# EAGLE board MKRWiFi1010V2.0 (EAGLE 9.3.0)
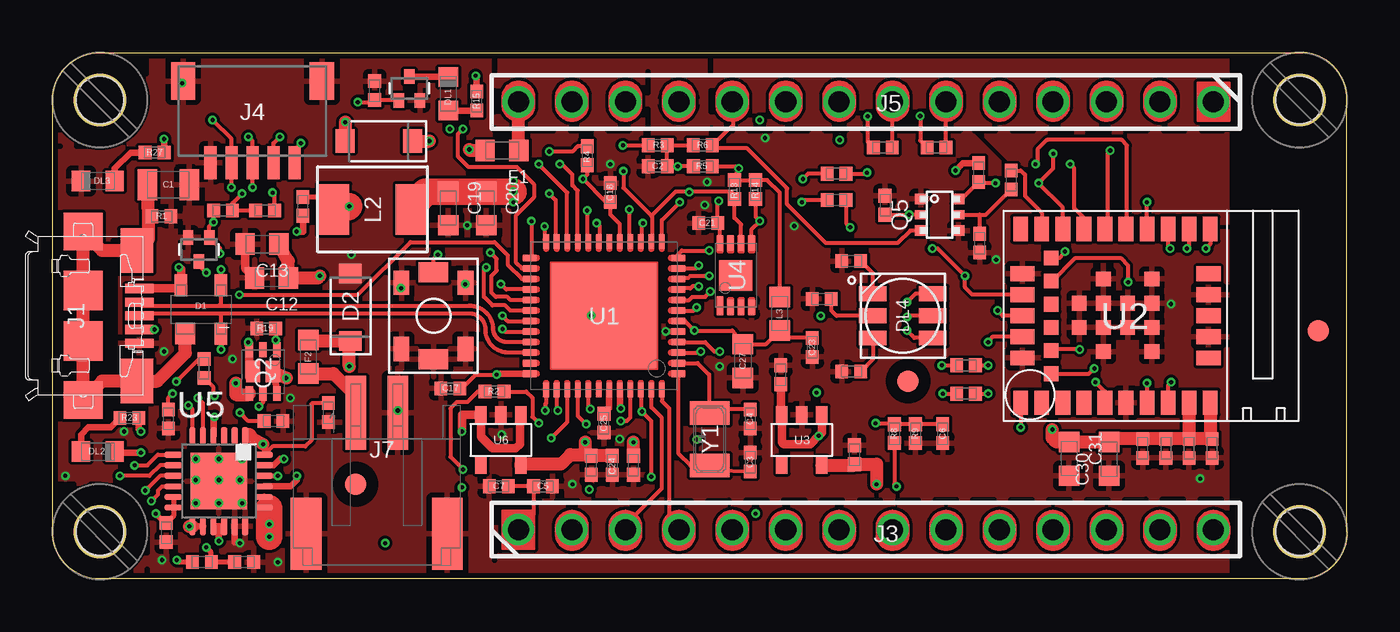
[diagram p0: board, top side]
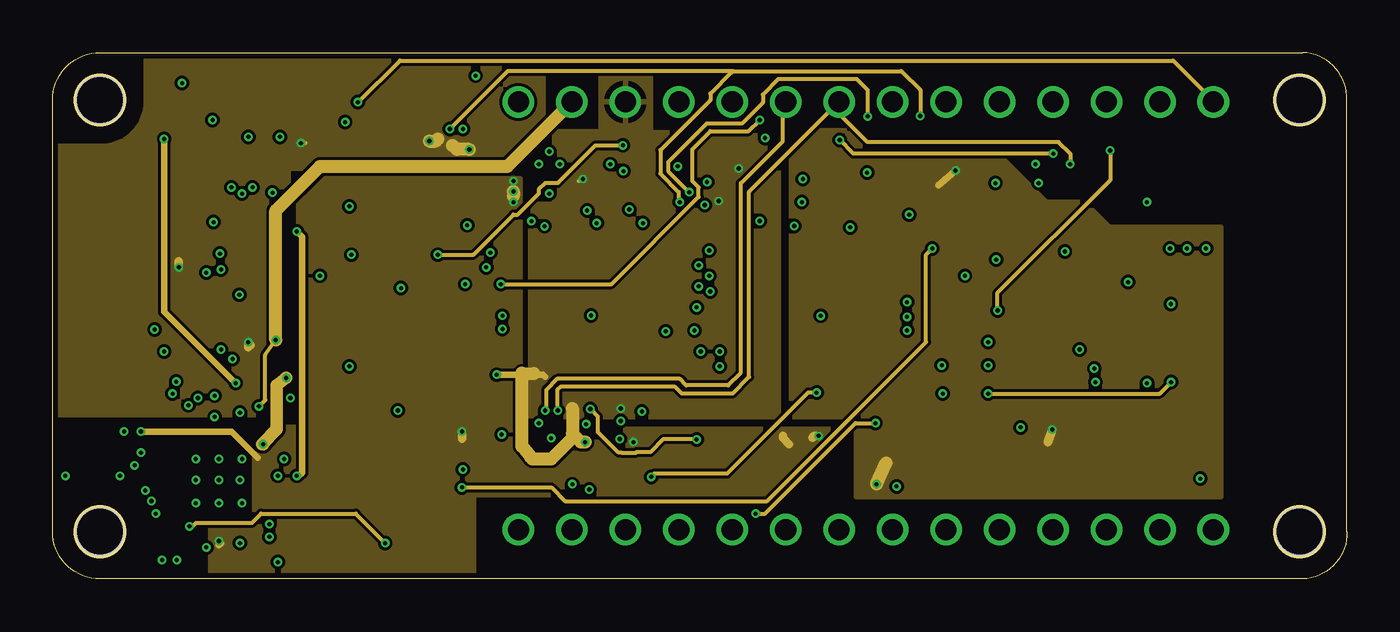
[diagram p1: board, inner layer PWR]
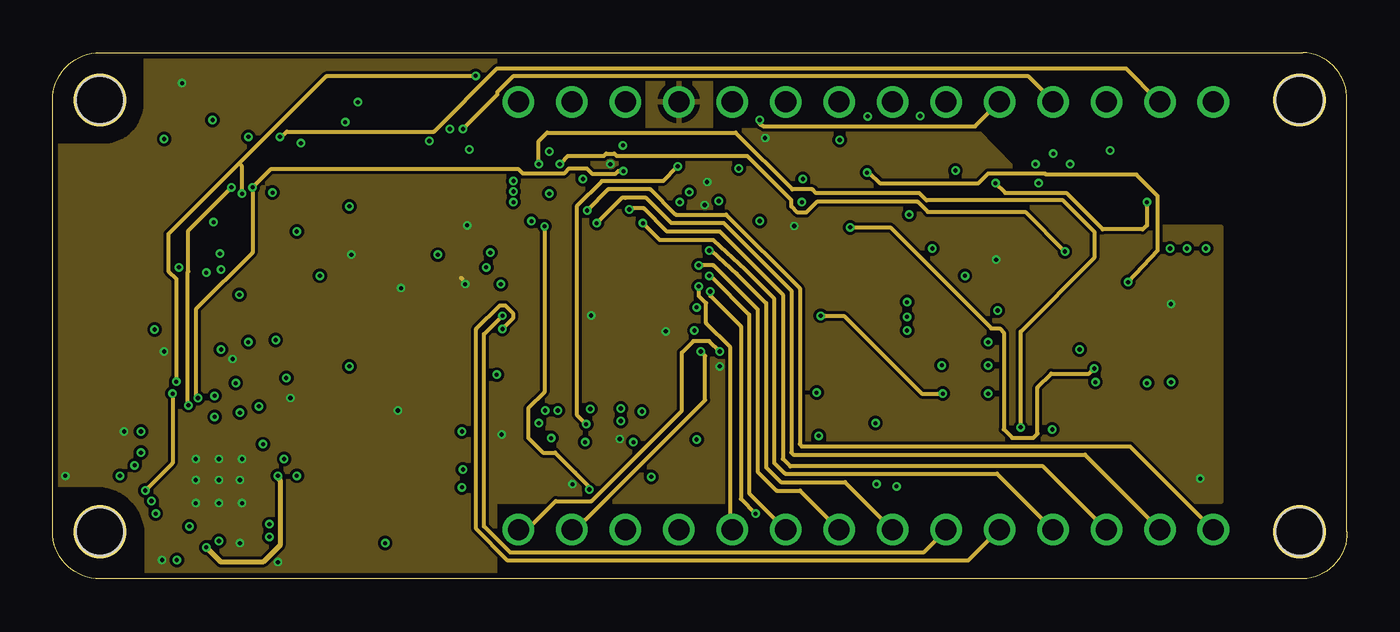
[diagram p2: board, inner layer MID]
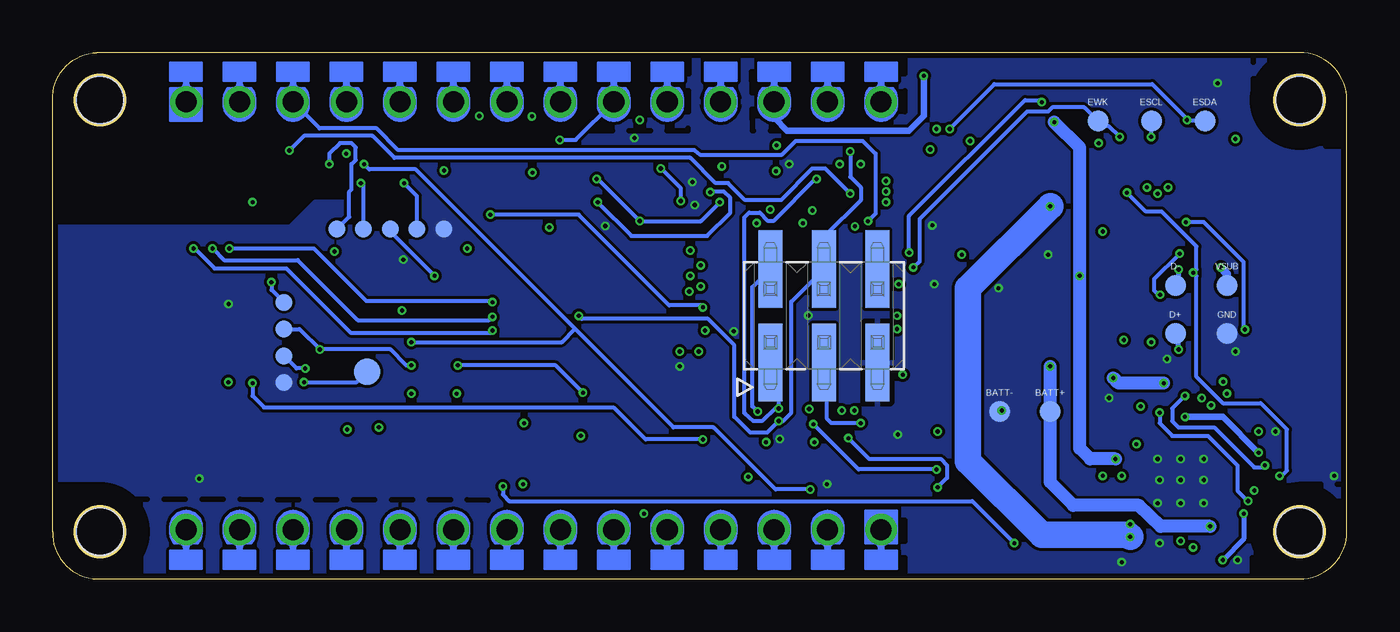
[diagram p3: board, bottom side, seen from below]

Size 61.5 x 25 mm. Coordinates in mm from the lower left corner, seen from the top.
Outline: 0,2.25 0,22.75 arc-90 2.25,25 59.4,25 arc-90 61.5,22.75 61.5,2.25 arc-90 59.4,0 2.25,0 arc-90 0,2.25
Copper layers (1*2*15*16): Top 0.035mm / dielectric 0.2mm / PWR 0.0175mm / dielectric 0.3mm / MID 0.0175mm / dielectric 0.2mm / Bottom 0.035mm
Design rules "B&B_4layers *": minimum track width 6mil, minimum drill 0.195mm, track to track 5.5mil, track to pad 5.5mil, pad to pad 5mil, via to via 5mil, smd to smd 0mil, copper to edge 10mil, drill to drill 8mil, minimum pad ring 6mil, minimum via ring 4mil, stop-mask expansion 4mil, vias tented up to drill 25mil, thermal gap 10mil
Net classes: 0 default: width 0.19 mm, drill 0.19 mm; 1 usb: width 0.19 mm, drill 0.19 mm, clearance 0.127 mm
Holes 2.25 mm at 2.25,2.25 59.25,2.25 59.25,22.75 2.25,22.75
tRestrict: area 0,0 to 4.5,4.5; area 0,20.5 to 4.5,25; area 57,20.5 to 61.5,25; area 57,0 to 61.5,4.5; 119 lines
bRestrict: area 0,0 to 4.5,4.5; area 0,20.5 to 4.5,25; area 57,0 to 61.5,4.5; area 57,20.5 to 61.5,25; 119 lines

## Footprints (pad centres in the part's own frame; a part is rotated, then mirrored left to right if it is on the bottom)
TP-1.00MM = smd 1 x 1 bottom: X 0,0
0805-R2013X50N = smd 0.95 x 1.45: 1 -1,0; 2 1,0
0402-1005X55N = smd 0.62 x 0.62: 1 -0.45,0; 2 0.45,0
0603-1608X90N = smd 0.95 x 1: 1 -0.8,0; 2 0.8,0
SOT190P230X110-4N = smd 1 x 1: 1 -1.15,0.75 | smd 1 x 0.6: 2 -1.15,-0.95; 3 1.15,-0.95; 4 1.15,0.95
SODFL3517X110N = smd 0.91 x 1.07: A 1.605,0; C -1.605,0
LEDC1608X80N-AK = smd 0.9 x 0.95: A 0.8,0; C -0.8,0
RGBLED = smd 1.3 x 0.7: 1 -1.425,1.05; 2 -1.425,0; 3 -1.425,-1.05; 4 1.425,-1.05; 5 1.425,0; 6 1.425,1.05
FD-1-1.5 = smd 1.016 x 1.016: P$1 0,0
TP-0.8MM = smd 0.8 x 0.8 bottom: X 0,0
ZX62-AB-5PA = smd 0.4 x 1.35: 1 -1.3,3.025; 2 -0.65,3.025; 3 0,3.025; 4 0.65,3.025; 5 1.3,3.025 | smd 2.1 x 1.6: 6 3.1,2.9; 11 -3.1,2.9 | smd 1.8 x 1.9: 7 4,0.35; 10 -4,0.35 | smd 1.9 x 1.9: 8 1.2,0.35; 9 -1.2,0.35
2X3_SMT = smd 1.143 x 3.683: 1 -2.54,-2.223; 2 -2.54,2.223; 3 0,-2.223; 4 0,2.223; 5 2.54,-2.223; 6 2.54,2.223
1X14_SMD_TH = drill 1: 1 0,0; 2 2.54,0; 3 5.08,0; 4 7.62,0; 5 10.16,0; 6 12.7,0; 7 15.24,0; 8 17.78,0; 9 20.32,0; 10 22.86,0; 11 25.4,0; 12 27.94,0; 13 30.48,0; 14 33.02,0
SM05B-SRSS-TB = smd 0.6 x 1.55: 1 -2,2.425; 2 -1,2.425; 3 0,2.425; 4 1,2.425; 5 2,2.425 | smd 1.2 x 1.8: SH1 -3.3,-1.45; SH2 3.3,-1.45
JST-S2B-PH-SM4-TB = smd 1 x 3.5: 1 -1,2.95; 2 1,2.95 | smd 1.5 x 3.4: 3 3.35,-2.8; 4 -3.35,-2.8
SRP4020 = smd 1.5 x 2.4: 1 -1.85,0; 2 1.85,0
TP-1.27MM = smd 1.27 x 1.27 bottom: X 0,0
C&K_PTS820_NO_HOLES = smd 1.15 x 0.75: 1 -1.575,1.525; 2 -1.575,-1.525; 3 1.575,1.525; 4 1.575,-1.525 | smd 0.95 x 1.4: 5 -2.075,0; 6 2.075,0
SOTFL50P160X78-3 = smd 0.5 x 0.66: D 0,0.57; G -0.5,-0.57; S 0.5,-0.57
SON65P205X205X75-8N-MWSD = smd 0.67 x 0.37: A 1.04,-0.65; D 1.04,0.65; G -1.04,0; K -1.04,-0.65; NC 1.04,0; S -1.04,0.65 | smd 1 x 0.7: D2 0,0.467; K2 0,-0.467
SOT363 = smd 0.6 x 0.5: 1 -0.9,0.75; 3 -0.9,-0.75; 4 0.9,-0.75; 6 0.9,0.75 | smd 0.6 x 0.4: 2 -0.9,0; 5 0.9,0
QFN50P700X700X90-49XN-EPSQ515 = smd 0.65 x 0.28: 1 -3.525,2.75; 2 -3.525,2.25; 3 -3.525,1.75; 4 -3.525,1.25; 5 -3.525,0.75; 6 -3.525,0.25; 7 -3.525,-0.25; 8 -3.525,-0.75; 9 -3.525,-1.25; 10 -3.525,-1.75; 11 -3.525,-2.25; 12 -3.525,-2.75; 25 3.525,-2.75; 26 3.525,-2.25; 27 3.525,-1.75; 28 3.525,-1.25; 29 3.525,-0.75; 30 3.525,-0.25; 31 3.525,0.25; 32 3.525,0.75; 33 3.525,1.25; 34 3.525,1.75; 35 3.525,2.25; 36 3.525,2.75 | smd 0.28 x 0.65: 13 -2.75,-3.525; 14 -2.25,-3.525; 15 -1.75,-3.525; 16 -1.25,-3.525; 17 -0.75,-3.525; 18 -0.25,-3.525; 19 0.25,-3.525; 20 0.75,-3.525; 21 1.25,-3.525; 22 1.75,-3.525; 23 2.25,-3.525; 24 2.75,-3.525; 37 2.75,3.525; 38 2.25,3.525; 39 1.75,3.525; 40 1.25,3.525; 41 0.75,3.525; 42 0.25,3.525; 43 -0.25,3.525; 44 -0.75,3.525; 45 -1.25,3.525; 46 -1.75,3.525; 47 -2.25,3.525; 48 -2.75,3.525 | smd 5 x 5: 49 0,0
NINA-W1X = smd 0.7 x 1.15: 1 4.95,4.125; 2 3.95,4.125; 3 2.95,4.125; 4 1.95,4.125; 5 0.95,4.125; 6 -0.05,4.125; 7 -1.05,4.125; 8 -2.05,4.125; 9 -3.05,4.125; 10 -4.05,4.125; 16 -4.05,-4.125; 17 -3.05,-4.125; 18 -2.05,-4.125; 19 -1.05,-4.125; 20 -0.05,-4.125; 21 0.95,-4.125; 22 1.95,-4.125; 23 2.95,-4.125; 24 3.95,-4.125; 25 4.95,-4.125 | smd 1.15 x 0.7: 11 -3.975,2; 12 -3.975,1; 13 -3.975,0; 14 -3.975,-1; 15 -3.975,-2; 26 4.875,-2; 27 4.875,-1; 28 4.875,0; 29 4.875,1; 30 4.875,2 | smd 0.7 x 0.7: 31 3.5,2.75; 32 3.5,1.65; 33 3.5,0.55; 34 3.5,-0.55; 35 3.5,-1.65; 36 3.5,-2.75; GND@1 -1.28,1.7; GND@2 -1.28,0.55; GND@3 -1.28,-0.6; GND@4 -1.28,-1.75; GND@5 -0.13,0.55; GND@6 -0.13,-0.6; GND@7 1.02,1.7; GND@8 1.02,0.55; GND@9 1.02,-0.6; GND@10 1.02,-1.75; GND@11 2.17,0.55; GND@12 2.17,-0.6
SOT25 = smd 0.55 x 0.8: 1 0.95,1.2; 2 0,1.2; 3 -0.95,1.2; 4 -0.95,-1.2; 5 0.95,-1.2
SON50P300X200X60-9N-EP160X140 = smd 0.85 x 0.3: 1 -1.45,0.75 | smd 0.7 x 0.3: 2 -1.525,0.25; 3 -1.525,-0.25; 4 -1.525,-0.75; 5 1.525,-0.75; 6 1.525,-0.25; 7 1.525,0.25; 8 1.525,0.75 | smd 1.4 x 1.6: 9 0,0
QFN24 = smd 0.3 x 0.85: 1 1.25,2.155; 2 0.75,2.155; 3 0.25,2.155; 4 -0.25,2.155; 5 -0.75,2.155; 6 -1.25,2.155; 13 -1.25,-2.155; 14 -0.75,-2.155; 15 -0.25,-2.155; 16 0.25,-2.155; 17 0.75,-2.155; 18 1.25,-2.155 | smd 0.85 x 0.3: 7 -2.155,1.25; 8 -2.155,0.75; 9 -2.155,0.25; 10 -2.155,-0.25; 11 -2.155,-0.75; 12 -2.155,-1.25; 19 2.155,-1.25; 20 2.155,-0.75; 21 2.155,-0.25; 22 2.155,0.25; 23 2.155,0.75; 24 2.155,1.25 | smd 2.7 x 2.7: 25 0,0
ABS07 = smd 1.1 x 1.9: 1 -1.25,0; 2 1.25,0

## Placement (x,y rotation side)
BATT+  DNP  [TP-1.00MM]  14.1,7.95 0 top
BATT-  DNP  [TP-1.00MM]  16.5,7.95 0 top
C1  4n7  [0805-R2013X50N]  5.5,18.73 0 top
C2  100n  [0402-1005X55N]  28.75,19.6 180 top
C3  20p  [0402-1005X55N]  33.15,5.55 270 top
C4  20p  [0402-1005X55N]  33.15,7.6 90 top
C5  4u7  [0402-1005X55N]  23.3,4.4 0 top
C6  100n  [0402-1005X55N]  42.3,6.9 270 top
C7  100n  [0402-1005X55N]  21.2,4.4 180 top
C8  100n  [0402-1005X55N]  55.1,6.2 270 top
C9  100n  [0402-1005X55N]  54,6.2 90 top
C12  10u  [0603-1608X90N]  10.4,14.3 180 top
C13  10u  [0603-1608X90N]  9.95,15.9 180 top
C14  1u  [0402-1005X55N]  13.1,7.9 270 top
C15  47n  [0402-1005X55N]  11.9,17.7 90 top
C16  4u7  [0402-1005X55N]  9.1,0.8 0 top
C17  100n  [0402-1005X55N]  18.9,9.05 180 top
C18  100n  [0402-1005X55N]  26.5,18.35 90 top
C19  10u  [0603-1608X90N]  18.8,17.6 270 top
C20  10u  [0603-1608X90N]  20.6,17.6 270 top
C21  100n  [0402-1005X55N]  31.15,16.9 180 top
C22  1u  [0402-1005X55N]  27.6,5.4 270 top
C23  100n  [0402-1005X55N]  36.1,11 270 top
C24  100n  [0402-1005X55N]  26.6,5.4 270 top
C25  1u  [0402-1005X55N]  26.2,7.4 270 top
C26  1u  [0402-1005X55N]  25.6,5.4 270 top
C27  4u7  [0603-1608X90N]  32.8,10.35 270 top
C28  DNP  [0402-1005X55N]  52.9,6.2 90 top
C29  DNP  [0402-1005X55N]  51.8,6.2 270 top
C30  DNP  [0603-1608X90N]  50.2,5.7 90 top
C31  DNP  [0603-1608X90N]  48.3,5.7 270 top
C32  1u  [0402-1005X55N]  34.6,9.7 90 top
C33  1u  [0402-1005X55N]  38.1,5.9 90 top
D1  PRTR5V  [SOT190P230X110-4N]  7.05,12.8 90 top
D2  PMEG6020  [SODFL3517X110N]  14.15,12.9 90 top
D3  PMEG6020  [SODFL3517X110N]  15.5,20.8 180 top
D+  DNP  [TP-1.00MM]  8.15,11.65 0 top
D-  DNP  [TP-1.00MM]  8.15,13.95 0 top
DL1  YELLOW  [LEDC1608X80N-AK]  18.8,23.05 270 top
DL2  ORANGE  [LEDC1608X80N-AK]  2.15,6.05 180 top
DL3  GREEN  [LEDC1608X80N-AK]  2.15,18.9 0 top
DL4  RGB  [RGBLED]  40.4,12.5 180 top
ESCL  DNP  [TP-1.00MM]  9.29,21.75 0 top
ESDA  DNP  [TP-1.00MM]  6.75,21.75 0 top
EWK  DNP  [TP-1.00MM]  11.83,21.75 0 top
F1  MFFSMF050  [0603-1608X90N]  21.35,20.35 180 top
F2  MFFSMF050  [0603-1608X90N]  12.15,10.55 90 top
FD1  DNP  [FD-1-1.5]  14.4,4.5 0 top
FD2  DNP  [FD-1-1.5]  60.15,11.8 0 top
FD3  DNP  [FD-1-1.5]  40.65,9.4 0 top
FRAME1  DNP  [FRAME]  0,0 0 top
FRAME2  DNP  [FRAME]  0,0 0 top
GND  DNP  [TP-1.00MM]  5.7,11.65 0 top
GPIO0  DNP  [TP-0.8MM]  45.46,16.62 0 top
J1  -  [ZX62-AB-5PA]  1.1,12.5 270 top
J2  DNP  [2X3_SMT]  24.85,12.5 0 bottom
J3  -  [1X14_SMD_TH]  22.13,2.34 0 top
J4  -  [SM05B-SRSS-TB]  9.5,22.2 180 top
J5  -  [1X14_SMD_TH]  55.15,22.66 180 top
J7  -  [JST-S2B-PH-SM4-TB]  15.4,4.95 0 top
JCLK  DNP  [TP-0.8MM]  50.5,13.13 0 top
JGND  DNP  [TP-0.8MM]  50.5,9.32 0 top
JTDO  DNP  [TP-0.8MM]  50.5,11.87 0 top
JTMS  DNP  [TP-0.8MM]  50.5,10.6 0 top
L2  2u2  [SRP4020]  15.2,17.55 0 top
L3  BLM18PG471  [0603-1608X90N]  34.55,12.6 270 top
LPO_IN  DNP  [TP-1.27MM]  46.55,9.85 0 top
PB1  PTS820  [C&K_PTS820_NO_HOLES]  18.1,12.5 90 top
PGND  DNP  [TP-0.8MM]  42.92,16.62 0 top
Q1  2N7002  [SOTFL50P160X78-3]  16.95,23.3 0 top
Q2  SIA817  [SON65P205X205X75-8N-MWSD]  10,9.85 90 top
Q3  2N7002  [SOTFL50P160X78-3]  6.95,15.65 180 top
Q5  BSS138PS  [SOT363]  42.15,17.3 0 top
R1  1M  [0402-1005X55N]  5.17,17.23 180 top
R2  39R  [0402-1005X55N]  21,8.9 180 top
R3  330R  [0402-1005X55N]  28.75,20.6 0 top
R4  1k  [0402-1005X55N]  25.4,20.1 270 top
R5  10k  [0402-1005X55N]  30.9,19.6 0 top
R6  330R  [0402-1005X55N]  30.89,20.6 0 top
R7  10k  [0402-1005X55N]  44,19.3 90 top
R8  330k  [0402-1005X55N]  40,6.9 270 top
R9  1M2  [0402-1005X55N]  41,6.9 90 top
R10  100k  [0402-1005X55N]  39.55,17.75 90 top
R11  100k  [0402-1005X55N]  44.05,15.95 270 top
R12  0R  [0402-1005X55N]  43.4,8.8 0 top
R13  4k7  [0402-1005X55N]  32.4,18.5 90 top
R14  4k7  [0402-1005X55N]  33.4,18.5 90 top
R15  330R  [0402-1005X55N]  20.15,22.7 270 top
R16  100k  [0402-1005X55N]  15.3,23.2 270 top
R17  0R  [0402-1005X55N]  45.55,18.95 270 top
R18  0R  [0402-1005X55N]  37.25,19.25 180 top
R19  100k  [0402-1005X55N]  10.15,11.9 0 top
R20  0R  [0402-1005X55N]  37.25,18 180 top
R21  10k  [0402-1005X55N]  8.1,17.5 180 top
R22  0R  [0402-1005X55N]  43.4,10.15 0 top
R23  330R  [0402-1005X55N]  3.65,7.65 0 top
R24  10k  [0402-1005X55N]  7.2,10 270 top
R25  10k  [0402-1005X55N]  5.5,7.6 90 top
R26  10k  [0402-1005X55N]  10.1,17.5 0 top
R27  390R  [0402-1005X55N]  4.85,20.25 0 top
R28  330R  [0402-1005X55N]  10.5,7.5 0 top
R29  10k  [0402-1005X55N]  5.4,2.2 90 top
R30  5k49  [0402-1005X55N]  7.1,0.8 180 top
R31  0R  [0402-1005X55N]  42,20.5 180 top
R32  0R  [0402-1005X55N]  39.45,20.5 180 top
R34  330R  [0402-1005X55N]  36.55,13.3 0 top
R35  330R  [0402-1005X55N]  37.95,9.85 0 top
R36  330R  [0402-1005X55N]  37.95,15.1 0 top
RST  DNP  [TP-0.8MM]  44.19,16.62 0 top
RXD  DNP  [TP-0.8MM]  46.73,16.62 0 top
TXD  DNP  [TP-0.8MM]  48,16.62 0 top
U1  D21G18  [QFN50P700X700X90-49XN-EPSQ515]  26.2,12.5 180 top
U2  NINA-W102  [NINA-W1X]  50.95,12.5 180 top
U3  AP2112K-3.3  [SOT25]  35.6,6.6 0 top
U4  ECC508  [SON50P300X200X60-9N-EP160X140]  32.46,14.43 90 top
U5  BQ24195L  [QFN24]  7.9,4.65 0 top
U6  AP2112K-3.3  [SOT25]  21.3,6.6 0 top
U$5  [MH_RND_F_2.2MM_NM]  2.25,2.25 90 top
U$6  [MH_RND_F_2.2MM_NM]  2.25,22.75 90 top
U$7  [MH_RND_F_2.2MM_NM]  59.25,22.75 90 top
U$8  [MH_RND_F_2.2MM_NM]  59.25,2.25 90 top
VSUB  DNP  [TP-1.00MM]  5.7,13.95 0 top
Y1  32768Hz  [ABS07]  31.23,6.64 270 top

## Library data of the parts
BATT+ BATT- D+ D- ESCL ESDA EWK FD1-FD3 GND GPIO0 JCLK JGND JTDO JTMS LPO_IN PGND RST RXD TXD VSUB = Arduino-utility; CODE-ARDUINO: DNP; DATASHEET: DNP; DISTRIBUTOR-LINK: DNP; DISTRIBUTOR-PN: DNP; MANUFACTURER: DNP; MANUFACTURER-PN: DNP
C1 = Arduino-rcl; CODE-ARDUINO: 0689; DATASHEET: http://www.kemet.com/Lists/ProductCatalog/Attachments/40/KEM_C1010_X7R_HV_SMD.pdf; DISTRIBUTOR-LINK: www.kemet.com/docfinder?Partnumber=C0805C472KDRACTU; DISTRIBUTOR-PN: 399-6738-1-ND; MANUFACTURER: Kemet; MANUFACTURER-PN: C0805C472KDRACTU; VOLTAGE: 1KV
C2 C6-C9 C17 C18 C21 C23 C24 = Arduino-rcl; CODE-ARDUINO: 0132; DATASHEET: http://www.tdk.com/pdf/TDKMLCCCapRange.pdf; DISTRIBUTOR-LINK: http://www.digikey.com/product-detail/en/tdk-corporation/C1005X5R1H104K050BB/445-5942-1-ND/2443982; DISTRIBUTOR-PN: 445-5942-1-ND; MANUFACTURER: TDK; MANUFACTURER-PN: C1005X5R1H104K050BB
C3 C4 = Arduino-rcl; CODE-ARDUINO: 2188; DATASHEET: http://www.kemet.com/docfinder?Partnumber=CBR04C200J5GAC; DISTRIBUTOR-LINK: http://www.digikey.com/product-detail/en/kemet/CBR04C200J5GAC/399-6173-1-ND/2732143; DISTRIBUTOR-PN: 399-6173-1-ND; MANUFACTURER: Kemet; MANUFACTURER-PN: CBR04C200J5GAC
C5 C16 = Arduino-rcl; CODE-ARDUINO: 0833; DATASHEET: http://search.murata.co.jp/Ceramy/image/img/A01X/partnumbering_e_01.pdf; DISTRIBUTOR-LINK: http://www.digikey.com/product-detail/en/murata-electronics-north-america/GRM155R60J475ME47D/490-5915-1-ND/3719860; DISTRIBUTOR-PN: 490-5915-1-ND; MANUFACTURER: Murata; MANUFACTURER-PN: GRM155R60J475ME47D
C12 C13 C19 C20 = Arduino-rcl; CODE-ARDUINO: 2213; DATASHEET: http://www.murata.com/~/media/webrenewal/support/library/catalog/products/capacitor/mlcc/c02e.pdf; DISTRIBUTOR-LINK: http://www.digikey.com/product-search/en?keywords=490-10728-1-ND; DISTRIBUTOR-PN: 490-10728-1-ND; MANUFACTURER: Murata; MANUFACTURER-PN: GRM188R61C106KAALD
C14 C22 C25 C26 C32 C33 = Arduino-rcl; CODE-ARDUINO: -; DATASHEET: http://search.murata.co.jp/Ceramy/image/img/A01X/partnumbering_e_01.pdf; DISTRIBUTOR-LINK: http://www.digikey.com/product-detail/en/murata-electronics-north-america/GRM155R61E105KA12D/490-10017-1-ND/5026367; DISTRIBUTOR-PN: 490-10017-1-ND; MANUFACTURER: Murata; MANUFACTURER-PN: GRM155R61E105KA12D
C15 = Arduino-rcl; CODE-ARDUINO: 2216; DATASHEET: http://www.murata.com/~/media/webrenewal/support/library/catalog/products/capacitor/mlcc/c02e.pdf; DISTRIBUTOR-LINK: https://www.digikey.com/product-detail/en/murata-electronics-north-america/GRM155R71E473KA88D/490-3254-1-ND/702795; DISTRIBUTOR-PN: 490-3254-1-ND; MANUFACTURER: Murata; MANUFACTURER-PN: GRM155R71E473KA88D
C27 = Arduino-rcl; CODE-ARDUINO: 0458; DATASHEET: http://www.murata.com/~/media/webrenewal/support/library/catalog/products/capacitor/mlcc/c02e.pdf; DISTRIBUTOR-LINK: http://www.digikey.com/product-search/en?keywords=490-7203-1-ND; DISTRIBUTOR-PN: 490-7203-1-ND; MANUFACTURER: Murata; MANUFACTURER-PN: GRM188R61E475KE11D
C28-C31 = Arduino-rcl; CODE-ARDUINO: DNP; DATASHEET: DNP; DISTRIBUTOR-LINK: DNP; DISTRIBUTOR-PN: DNP; MANUFACTURER: DNP; MANUFACTURER-PN: DNP
D1 = Arduino-diodes; CODE-ARDUINO: 2209; DATASHEET: http://www.nxp.com/documents/data_sheet/PRTR5V0U2X.pdf; DISTRIBUTOR-LINK: http://www.digikey.com/product-detail/en/nxp-semiconductors/PRTR5V0U2X,215/568-4140-1-ND/1589981; DISTRIBUTOR-PN: 568-4140-1-ND; MANUFACTURER: NXP; MANUFACTURER-PN: PRTR5V0U2X,215
D2 D3 = Arduino-diodes; CODE-ARDUINO: 2208; DATASHEET: http://www.nxp.com/documents/data_sheet/PMEG6020AELR.pdf; DISTRIBUTOR-LINK: http://www.digikey.com/products/en?keywords=%20568-12710-1-ND; DISTRIBUTOR-PN: 568-12710-1-ND; MANUFACTURER: NXP; MANUFACTURER-PN: PMEG6020AELRX
DL1 = Arduino-diodes; CODE-ARDUINO: 2243; DATASHEET: http://media.digikey.com/pdf/Data%20Sheets/Avago%20PDFs/HSMz-Czzz.pdf; DISTRIBUTOR-LINK: http://www.digikey.com/product-detail/en/broadcom-limited/HSMY-C190/516-1424-1-ND/637748; DISTRIBUTOR-PN: 516-1424-1-ND; MANUFACTURER: Avago; MANUFACTURER-PN: HSMY-C190
DL2 = Arduino-diodes; CODE-ARDUINO: 2207; DATASHEET: http://media.digikey.com/pdf/Data%20Sheets/Avago%20PDFs/HSMz-Czzz.pdf; DISTRIBUTOR-LINK: http://www.digikey.com/product-detail/en/broadcom-limited/HSMD-C190/516-2489-1-ND/2744915; DISTRIBUTOR-PN: 516-2489-1-ND; MANUFACTURER: Avago; MANUFACTURER-PN: HSMD-C190
DL3 = Arduino-diodes; CODE-ARDUINO: 2204; DATASHEET: http://media.digikey.com/pdf/Data%20Sheets/Avago%20PDFs/HSMz-Czzz.pdf; DISTRIBUTOR-LINK: http://www.digikey.com/product-detail/en/broadcom-limited/HSMG-C190/516-1425-1-ND/637749; DISTRIBUTOR-PN: 516-1425-1-ND; MANUFACTURER: Avago; MANUFACTURER-PN: HSMG-C190
DL4 = Arduino-diodes; CODE-ARDUINO: 2211; DATASHEET: http://www.osram-os.com/Graphics/XPic9/00134830_0.pdf; DISTRIBUTOR-LINK: https://www.digikey.com/product-detail/en/osram-opto-semiconductors-inc/LTRBGFSF-ABCB-QKYO-Z/475-2899-1-ND/2415091; DISTRIBUTOR-PN: 475-2899-1-ND; MANUFACTURER: OSRAM Opto Semiconductors Inc.; MANUFACTURER-PN: LTRBGFSF-ABCB-QKYO-Z
F1 F2 = Arduino-rcl; CODE-ARDUINO: 2217; DATASHEET: http://www.bourns.com/docs/Product-Datasheets/mffsmf.pdf; DISTRIBUTOR-LINK: http://www.digikey.com/product-detail/en/bourns-inc/MF-FSMF050X-2/MF-FSMF050X-2CT-ND/2039389; DISTRIBUTOR-PN: MF-FSMF050X-2CT-ND; MANUFACTURER: Bourns Inc; MANUFACTURER-PN: MF-FSMF050X-2
FRAME1 FRAME2 = Arduino-utility; CODE-ARDUINO: DNP; DATASHEET: DNP; DISTRIBUTOR-LINK: DNP; DISTRIBUTOR-PN: DNP; MANUFACTURER: DNP; MANUFACTURER-PN: DNP; NOTE: DNP
J1 = Arduino-connectors; CODE-ARDUINO: 2219; DATASHEET: https://www.hirose.com/product/en/download_file/key_name/ZX/category/Catalog/doc_file_id/31704/?file_category_id=4&item_id=13&is_series=1; DISTRIBUTOR-LINK: http://www.digikey.com/product-detail/en/hirose-electric-co-ltd/ZX62-AB-5PA(31)/H125279CT-ND/5994741; DISTRIBUTOR-PN: H125279CT-ND; MANUFACTURER: Hirose; MANUFACTURER-PN: ZX62-AB-5PA(31)
J2 = Arduino-connectors; CODE-ARDUINO: DNP; DATASHEET: DNP; DISTRIBUTOR-LINK: DNP; DISTRIBUTOR-PN: DNP; MANUFACTURER: DNP; MANUFACTURER-PN: DNP
J3 J5 = Arduino-connectors; CODE-ARDUINO: -; DATASHEET: -; DISTRIBUTOR-LINK: -; DISTRIBUTOR-PN: -; MANUFACTURER: ELDECO; MANUFACTURER-PN: FH254114DF08500T
J4 = Arduino-connectors; CODE-ARDUINO: 2353; DATASHEET: http://www.jst-mfg.com/product/pdf/eng/eSH.pdf; DISTRIBUTOR-LINK: http://www.digikey.com/product-detail/en/jst-sales-america-inc/SM05B-SRSS-TB(LF)(SN)/455-1805-1-ND/926876; DISTRIBUTOR-PN: 455-1805-1-ND; MANUFACTURER: JST; MANUFACTURER-PN: SM05B-SRSS-TB
J7 = Arduino-connectors; CODE-ARDUINO: 2355; DATASHEET: http://www.jst-mfg.com/product/pdf/eng/ePH.pdf; DISTRIBUTOR-LINK: http://www.digikey.com/product-detail/en/jst-sales-america-inc/S2B-PH-SM4-TB%28LF%29%28SN%29/455-1749-1-ND/926846; DISTRIBUTOR-PN: 455-1749-1-ND; MANUFACTURER: JST; MANUFACTURER-PN: S2B-PH-SM4-TB(LF)(SN)
L2 = Arduino-rcl; CODE-ARDUINO: 2218; DATASHEET: http://www.bourns.com/docs/Product-Datasheets/SRP4020TA.pdf; DISTRIBUTOR-LINK: https://www.digikey.com/product-detail/en/bourns-inc/SRP4020TA-2R2M/SRP4020TA-2R2MCT-ND/4901068; DISTRIBUTOR-PN: SRP4020TA-2R2MCT-ND; MANUFACTURER: Bourns; MANUFACTURER-PN: SRP4020TA-2R2M
L3 = Arduino-rcl; CODE-ARDUINO: 2217; DATASHEET: http://search.murata.co.jp/Ceramy/image/img/PDF/ENG/L0110S0100BLM18P.pdf; DISTRIBUTOR-LINK: http://www.digikey.com/product-detail/en/murata-electronics-north-america/BLM18PG471SN1D/490-5223-1-ND/1948399; DISTRIBUTOR-PN: 490-5223-1-ND; MANUFACTURER: Murata; MANUFACTURER-PN: BLM18PG471SN1D
PB1 = Arduino-pushbuttons; CODE-ARDUINO: 0277; DATASHEET: http://www.ckswitches.com/media/1474/pts820.pdf; DISTRIBUTOR-LINK: https://www.digikey.com/product-detail/en/c-k/PTS820-J15M-SMTR-LFS/CKN10506CT-ND/4176681; DISTRIBUTOR-PN: PTS820 J25K SMTR LFS-ND; MANUFACTURER: C&K; MANUFACTURER-PN: PTS820 J25K SMTR LFS
Q1 Q3 = Arduino-transistors; CODE-ARDUINO: 1612; DATASHEET: http://www.diodes.com/_files/datasheets/ds30301.pdf; DISTRIBUTOR-LINK: http://www.digikey.com/product-detail/en/diodes-incorporated/2N7002T-7-F/2N7002T-FDICT-ND/815290; DISTRIBUTOR-PN: 2N7002T-FDICT-ND; MANUFACTURER: Diodes Incorporated; MANUFACTURER-PN: 2N7002T-7-F
Q2 = Arduino-transistors; CODE-ARDUINO: 2220; DATASHEET: http://www.vishay.com/docs/62820/sia817edj.pdf; DISTRIBUTOR-LINK: http://www.digikey.com/product-detail/en/vishay-siliconix/SIA817EDJ-T1-GE3/SIA817EDJ-T1-GE3CT-ND/4142098; DISTRIBUTOR-PN: SIA817EDJ-T1-GE3CT-ND; MANUFACTURER: Vishay; MANUFACTURER-PN: SIA817EDJ-T1-GE3
Q5 = Arduino-transistors; DATASHEET: http://www.nxp.com/documents/data_sheet/BSS138PS.pdf; DISTRIBUTOR-LINK: http://www.digikey.com/product-detail/en/nxp-semiconductors/BSS138PS,115/568-8393-1-ND/2763927; DISTRIBUTOR-PN: 568-8393-1-ND; MANUFACTURER: NXP; MANUFACTURER-PN: BSS138PS,115
R1 = Arduino-rcl; CODE-ARDUINO: 0139; DATASHEET: www.yageo.com.tw/exep/pages/download/literatures/PYu-R_INT-thick_7.pdf; DISTRIBUTOR-LINK: http://www.digikey.com/product-detail/en/yageo/RC0402JR-07330RL/311-330JRCT-ND/729412; DISTRIBUTOR-PN: 311-330JRCT-ND; MANUFACTURER: Yageo; MANUFACTURER-PN: RC0402JR-07330RL
R2 = Arduino-rcl; CODE-ARDUINO: 0138; DATASHEET: www.yageo.com.tw/exep/pages/download/literatures/PYu-R_INT-thick_7.pdf; DISTRIBUTOR-LINK: http://www.digikey.com/product-detail/en/yageo/RC0402FR-0739RL/311-39.0LRCT-ND/729549; DISTRIBUTOR-PN: 311-39.0LRCT-ND; MANUFACTURER: Yageo; MANUFACTURER-PN: RC0402FR-0739RL
R3 R6 R15 R23 R28 R34-R36 = Arduino-rcl; CODE-ARDUINO: 2229; DATASHEET: www.yageo.com.tw/exep/pages/download/literatures/PYu-R_INT-thick_7.pdf; DISTRIBUTOR-LINK: http://www.digikey.com/product-detail/en/yageo/RC0402FR-07330RL/311-330LRCT-ND/729541; DISTRIBUTOR-PN: 311-330LRCT-ND; MANUFACTURER: Yageo; MANUFACTURER-PN: RC0402FR-07330RL
R4 = Arduino-rcl; CODE-ARDUINO: 0140; DATASHEET: www.yageo.com.tw/exep/pages/download/literatures/PYu-R_INT-thick_7.pdf; DISTRIBUTOR-LINK: http://www.digikey.com/product-detail/en/yageo/RC0402FR-071KL/311-1.00KLRCT-ND/729460; DISTRIBUTOR-PN: 311-1.00KLRCT-ND; MANUFACTURER: Yageo; MANUFACTURER-PN: RC0402FR-071KL
R5 R7 R21 R24-R26 R29 = Arduino-rcl; CODE-ARDUINO: 0136; DATASHEET: www.yageo.com.tw/exep/pages/download/literatures/PYu-R_INT-thick_7.pdf; DISTRIBUTOR-LINK: http://www.digikey.com/product-detail/en/yageo/RC0402FR-0710KL/311-10.0KLRCT-ND/729470; DISTRIBUTOR-PN: 311-10.0KLRCT-ND; MANUFACTURER: Yageo; MANUFACTURER-PN: RC0402FR-0710KL
R8 = Arduino-rcl; CODE-ARDUINO: 2192; DATASHEET: www.yageo.com.tw/exep/pages/download/literatures/PYu-R_INT-thick_7.pdf; DISTRIBUTOR-LINK: http://www.digikey.com/product-detail/en/yageo/RC0402JR-07330KL/311-330KJRCT-ND/729413; DISTRIBUTOR-PN: 311-330KJRCT-ND; MANUFACTURER: Yageo; MANUFACTURER-PN: RC0402JR-07330KL
R9 = Arduino-rcl; CODE-ARDUINO: 2352; DATASHEET: www.yageo.com.tw/exep/pages/download/literatures/PYu-R_INT-thick_7.pdf; DISTRIBUTOR-LINK: http://www.digikey.com/products/en?keywords=RC0402FR-071M2L-ND; DISTRIBUTOR-PN: RC0402FR-071M2L-ND; MANUFACTURER: Yageo; MANUFACTURER-PN: RC0402FR-071M2L
R10 R11 R16 R19 = Arduino-rcl; CODE-ARDUINO: 0134; DATASHEET: www.yageo.com.tw/exep/pages/download/literatures/PYu-R_INT-thick_7.pdf; DISTRIBUTOR-LINK: http://www.digikey.com/product-detail/en/yageo/RC0402FR-07100KL/311-100KLRCT-ND/729473; DISTRIBUTOR-PN: 311-100KLRCT-ND; MANUFACTURER: Yageo; MANUFACTURER-PN: RC0402FR-07100KL
R12 R17 R18 R20 R22 R31 R32 = Arduino-rcl; CODE-ARDUINO: 0039; DATASHEET: www.yageo.com.tw/exep/pages/download/literatures/PYu-R_INT-thick_7.pdf; DISTRIBUTOR-LINK: http://www.digikey.com/product-detail/en/yageo/RC0402FR-070RL/311-0.0LRCT-ND/2827888; DISTRIBUTOR-PN: 311-0.0LRCT-ND; MANUFACTURER: Yageo; MANUFACTURER-PN: RC0402FR-070RL
R13 R14 = Arduino-rcl; CODE-ARDUINO: 2196; DATASHEET: www.yageo.com.tw/exep/pages/download/literatures/PYu-R_INT-thick_7.pdf; DISTRIBUTOR-LINK: http://www.digikey.com/product-detail/en/yageo/RC0402FR-074K7L/311-4.7KLRCT-ND/2827881; DISTRIBUTOR-PN: 311-4.7KLRCT-ND; MANUFACTURER: Yageo; MANUFACTURER-PN: RC0402FR-074K7L
R27 = Arduino-rcl; CODE-ARDUINO: 2195; DATASHEET: www.yageo.com.tw/exep/pages/download/literatures/PYu-R_INT-thick_7.pdf; DISTRIBUTOR-LINK: https://www.digikey.com/product-detail/en/yageo/RC0402FR-07390RL/311-390LRCT-ND/2827929; DISTRIBUTOR-PN: 311-390LRCT-ND; MANUFACTURER: Yageo; MANUFACTURER-PN: RC0402FR-07390RL
R30 = Arduino-rcl; CODE-ARDUINO: 2197; DATASHEET: www.yageo.com.tw/exep/pages/download/literatures/PYu-R_INT-thick_7.pdf; DISTRIBUTOR-LINK: https://www.digikey.com/product-detail/en/yageo/RC0402FR-075K49L/311-5.49KLRCT-ND/729573; DISTRIBUTOR-PN: 311-5.49KLRCT-ND; MANUFACTURER: Yageo; MANUFACTURER-PN: RC0402FR-075K49L
U1 = Arduino-ucs&SoCs; CODE-ARDUINO: 2202; DATASHEET: http://www.atmel.com/Images/Atmel-42181-SAM-D21_Datasheet.pdf; DISTRIBUTOR-LINK: https://www.digikey.com/product-detail/en/microchip-technology/ATSAMD21G18A-MU/ATSAMD21G18A-MU-ND/4935894; DISTRIBUTOR-PN: ATSAMD21G18A-MU-ND; MANUFACTURER: Atmel; MANUFACTURER-PN: ATSAMD21G18A-MU
U2 = Arduino-ucs&SoCs; CODE-ARDUINO: 2205; DATASHEET: https://www.u-blox.com/sites/default/files/NINA-W1_DataSheet_%28UBX-17006694%29.pdf; DISTRIBUTOR-LINK: https://www.digikey.com/product-detail/en/u-blox-america-inc/NINA-W102/672-1070-1-ND/7931820; DISTRIBUTOR-PN: 672-1070-1-ND; MANUFACTURER: Ublocks; MANUFACTURER-PN: NINA-W102
U3 U6 = Arduino-ICs; CODE-ARDUINO: 2199; DATASHEET: https://www.diodes.com/assets/Datasheets/AP2112.pdf; DISTRIBUTOR-LINK: https://www.digikey.com/product-detail/en/diodes-incorporated/AP2112K-3.3TRG1/AP2112K-3.3TRG1DITR-ND/4470746; DISTRIBUTOR-PN: AP2112K-3.3TRG1DITR-ND; MANUFACTURER: Diodes Inc; MANUFACTURER-PN: AP2112K-3.3TRG1
U4 = Arduino-ICs; CODE-ARDUINO: 2203; DATASHEET: http://www.atmel.com/Images/Atmel-8923S-CryptoAuth-ATECC508A-Datasheet-Summary.pdf; DISTRIBUTOR-LINK: http://www.digikey.com/product-detail/en/atmel/ATECC508A-MAHDA-T/ATECC508A-MAHDA-TCT-ND/5213071; DISTRIBUTOR-PN: ATECC508A-MAHDA-TCT-ND; MANUFACTURER: Atmel; MANUFACTURER-PN: ATECC508A-MAHDA-T
U5 = Arduino-ICs; CODE-ARDUINO: 2201; DATASHEET: http://www.ti.com/lit/ds/symlink/bq24195.pdf; DISTRIBUTOR-LINK: https://www.digikey.com/product-detail/en/texas-instruments/BQ24195LRGET/296-35047-1-ND/3725759; DISTRIBUTOR-PN: 296-35047-1-ND; MANUFACTURER: Texas Instruments; MANUFACTURER-PN: BQ24195LRGET
U$5-U$8 = MK1_Zero
Y1 = Arduino-crystals; CODE-ARDUINO: 0213; DATASHEET: http://www.abracon.com/Resonators/ABS07.pdf; DISTRIBUTOR-LINK: http://www.digikey.com/product-detail/en/abracon-llc/ABS07-32.768KHZ-T/535-9542-1-ND/1237009; DISTRIBUTOR-PN: 535-9542-1-ND; MANUFACTURER: Abracon LLC; MANUFACTURER-PN: ABS07-32.768KHZ-T

## Nets
+3V3: C17.1 C18.1 C21.1 C24.1 C26.1 J2.1 J5.12 L3.1 R4.2 R5.2 R13.2 R14.2 R15.1 R21.1 R24.1 R26.1 U1.17 U1.36 U1.44 U4.8 U6.5
+3V3D: C8.1 C9.2 C28.2 C29.1 C30.2 C31.1 C33.1 R7.2 U2.9 U2.10 U3.5
+3V8: C19.1 C20.1 C22.1 C32.1 L2.2 R23.2 U3.1 U3.3 U5.15 U5.16 U6.1 U6.3
+5V: D1.4 D3.C F1.2 J1.1 J4.1 Q2.D Q2.D2 VSUB.X
GND: BATT-.X C1.2 C2.2 C3.1 C4.1 C5.2 C6.2 C7.2 C8.2 C9.1 C12.2 C13.2 C14.2 C16.2 C17.2 C18.2 C19.2 C20.2 C21.2 C22.2 C23.2 C24.2 C25.2 C26.2 C27.2 C28.1 C29.2 C30.1 C31.2 C32.2 C33.2 D2.A DL3.C GND.X J1.5 J2.5 J4.5 J4.SH1 J4.SH2 J5.11 J7.2 J7.3 J7.4 JGND.X PB1.1 PB1.2 PB1.3 PB1.4 PB1.5 PGND.X Q1.S Q3.S Q5.1 Q5.4 R1.1 R9.1 R10.2 R11.2 R16.1 R19.1 R25.1 R28.2 R29.1 R34.1 R35.1 R36.1 U1.5 U1.18 U1.35 U1.42 U1.49 U2.6 U2.12 U2.14 U2.26 U2.30 U2.GND@1 U2.GND@2 U2.GND@3 U2.GND@4 U2.GND@5 U2.GND@6 U2.GND@7 U2.GND@8 U2.GND@9 U2.GND@10 U2.GND@11 U2.GND@12 U3.2 U4.4 U5.17 U5.18 U5.25 U6.2
LED_BLUE: DL4.2 U2.17
LED_GREEN: DL4.1 U2.16
LED_RED: DL4.3 U2.18
N17658775: PB1.6 R3.1
N17798864: DL2.A R23.1
N17834267: DL3.A R27.1
N17852357: C23.1 C27.1 L3.2 U1.6
N17852431: C25.1 U1.43
N$1: C1.1 D1.1 J1.6 J1.7 J1.8 J1.9 J1.10 J1.11 R1.2
N$2: F1.1 J5.14
N$3: F2.1 J7.1
N$4: J2.3 R2.1
N$5: J5.7 R32.1
N$6: C6.1 R8.1 R9.2 U1.8
N$7: DL1.A R15.2
N$8: J5.6 R31.1
N$9: Q5.6 R7.1 RST.X U2.19
N$10: DL1.C Q1.D
N$11: JCLK.X R18.1 U2.35
N$12: JTMS.X R20.1 U2.31
N$13: R17.1 U2.24
N$14: DL4.5 R34.2
N$15: C15.2 L2.1 U5.19 U5.20
N$16: DL4.6 R35.2
N$17: C14.1 Q2.K Q2.K2 Q2.S R27.2 U5.1 U5.24
N$18: C15.1 U5.21
N$19: R28.1 U5.10
N$20: DL4.4 R36.2
N$21: C16.1 R30.1 U5.22
N$22: Q3.D R26.2 U5.8
N$23: R29.2 R30.2 U5.11 U5.12
N$24: R25.2 U5.9
N$25: LPO_IN.X U2.5
N$26: JTDO.X R22.2 U2.32
N$27: R12.2 U2.8
N$28: Q5.5 R11.1 R17.2
PA00_XIN32: C3.2 U1.1 Y1.2
PA01_XOUT32: C4.2 U1.2 Y1.1
PA02_AIN0: J3.2 U1.3
PA03_VREFA: C5.1 C7.1 J3.1 U1.4
PA04_AIN4: J3.5 U1.9
PA05_AIN5: J3.6 U1.10
PA06_AIN6: J3.7 U1.11
PA07_AIN7: J3.8 U1.12
PA08_S0_I2C_SDA: ESDA.X J4.4 R14.1 R18.2 R31.2 U1.13 U4.5 U5.6
PA09_S0_I2C_SCL: ESCL.X J4.3 R13.1 R20.2 R32.2 U1.14 U4.6 U5.5
PA10_TCC0-W2: J3.11 U1.15
PA11_TCC0-W3: J3.12 U1.16
PA12_S2_TX/MOSI: U1.21 U2.36
PA13_S2_RX/MISO: U1.22 U2.1
PA14_S2_RTS/CS: U1.23 U2.21 U2.28
PA15_S2_CTS/SCK: U1.24 U2.20 U2.29
PA16_S1_MOSI: J5.3 U1.25
PA17_S1_SCK: J5.4 U1.26
PA18_OTG: J1.4 Q3.G R21.2 U1.27
PA19_S1_MISO: J5.5 U1.28
PA20_TCC0-W6: J5.1 Q1.G R16.2 U1.29
PA21_TCC0-W7: EWK.X J4.2 J5.2 U1.30
PA22_TC4-W0: J3.9 U1.31
PA23_TC4-W1: J3.10 U1.32
PA27_GPIO0: GPIO0.X U1.39 U2.27
PA28_ACK: U1.41 U2.7
PA30_SWCLK: J2.4 R4.1 R12.1 U1.45
PA31_SWDIO: J2.2 R22.1 U1.46
PB02_AIN10: J3.3 U1.47
PB03_AIN11: J3.4 U1.48
PB08_RST: Q5.2 R10.1 U1.7
PB10_TCC0-W4: J3.13 U1.19
PB11_TCC0-W5: J3.14 U1.20
PB22_S5_TX: J5.9 RXD.X U1.37 U2.23
PB23_S5_RX: J5.8 TXD.X U1.38 U2.22
PMICINT: R24.2 U5.7
RESET#: J5.10 Q5.3 R6.2
RESETN: C2.1 R2.2 R3.2 R5.1 R6.1 U1.40
STAT: DL2.C U5.4
USB_N [usb]: D1.3 D-.X J1.2 U1.33
USB_P [usb]: D1.2 D+.X J1.3 U1.34
VBATT: BATT+.X D2.C F2.2 R8.2 U5.13 U5.14
VIN: J5.13 Q2.A Q2.G R19.2
VUSB1: C12.1 C13.1 D3.A U5.23

## Tracks (layer width: path | path; a pad name or v marks a point on that pad's centre or on a via)
+3V3  (via drill 0.2)
  Top 0.19: v5.88,9.38 6.88,10.38 7.12,10.38 R24.1
  Top 0.2: U4.8 31.71,16.74 C21.1 31.6,17.9 v31.65,17.95 | R5.2 32.5,19.6 v32.6,19.5 R13.2 R14.2 33.95,18.95 34.55,18.35 L3.1 | U1.17 26.95,16.85 26.5,17.3 C18.1 26.3,17.9 v25.2,19 25.4,19.2 R4.2 | C17.1 19.4,9 20.1,9.7 v21.1,9.7 | R26.1 R21.1 8.55,17.85 v9,18.3
  Top 0.305: U1.44 26.95,8.15 v27,8.1 | U1.36 21.15,9.75 v21.1,9.7 | R15.1 20.15,23.85 v20.1,23.9
  Top 0.61: 25.1,5.9 24.6,5.9 24.15,5.45 22.25,5.45 U6.5 | 25.1,5.9 25.55,5.9 C26.1 C24.1 | v25.3,6.5 25.3,6.1 25.1,5.9
  PWR 0.2: v25.2,19 25.1,19 25,18.9
  PWR 0.305: v21.1,9.7 23.3,9.7 23.4,9.6
  PWR 0.61: v25.3,6.5 25.1,6.5 24.8,6.8 | 24.8,6.8 24.7,6.9 24.7,8.1 | 22.88,9.75 22.3,9.78 22.3,6.3 22.7,5.8 22.8,5.7 23.7,5.7 24.8,6.8
  MID 0.19: v5.88,9.38 5.88,14.25 5.5,14.62 5.5,16.38 8.86,19.74 13,23.88 20,23.88 v20.1,23.9
  MID 0.2: v9,18.3 9,19.6 8.86,19.74
  Bottom 0.19: 25.25,19 v25.2,19 | 32.62,19.5 v32.6,19.5
  Bottom 0.2: 25.25,19 27.25,17 27.5,17 27.9,17.4 28.4,17.4 28.62,17.18 28.62,7.88 28.6,7.85 28.2,7.5 27.8,7.5 27.15,8.1 v27,8.1 27,9.89 | v31.65,17.95 31.65,18.55 v32.6,19.5
  Bottom 0.305: 27,9.89 J2.1 | v20.1,23.9 20.1,22 20.8,21.3 26.6,21.3 27.2,21.9 27.2,22.64 J5.12
  pour PWR: 26.05,25 26.05,21.25 23.85,21.25 23.85,17.85 23.8,17.8 22.7,17.8 22.7,7.7 34.5,7.7 34.5,21.2 28.4,21.2 28.4,24.95
+3V3D  (via drill 0.2)
  Top 0.305: R7.2 43.25,19.75 v42.9,19.4
  Top 0.406: 50.35,6.65 C30.2 | 55,6.75 C8.1
  Top 0.61: C8.1 C9.2 | C9.2 C28.2 C29.1 50.35,6.65 | C30.2 C31.1 47.7,6.5 47.5,6.7 v47.5,7.1 | U2.10 55,6.75 | U2.9 C9.2 | U3.5 38.05,5.4 C33.1 39.15,5.45 v39.15,4.5
  PWR 0.305: v42.9,19.4 42.2,18.8 42.1,18.7
  PWR 0.406: v47.5,7.1 47.3,6.5
  PWR 0.61: v39.15,4.5 39.6,5.5
  pour PWR: 35.1,21.3 35.1,7.7 38.2,7.7 38.2,3.9 55.5,3.9 55.5,16.7 50.2,16.7 49,17.9 47.2,17.9 43.8,21.3
+3V8  (via drill 0.2)
  Top 0.305: U5.15 U5.16 8.1,2.5 7.9,2.3 v7.9,1.8 | R23.2 4.1,7.1 v4.2,7
  Top 0.406: v19.45,7 19.45,7.8 U6.3 20.35,6.75 20.9,6.2 22,6.2 22.2,6.4 22.2,7.75 U6.1 | U3.1 36.55,6.95 v36.4,6.8 36,6.4 34.75,6.4 34.65,6.5 U3.3 34.6,7.85 C32.1
  Top 0.61: C22.1 v27.6,6.5
  Top 1.27: L2.2 17.7,18.4 C19.1 C20.1 v21.9,18.4
  PWR 0.305: v7.9,1.8 7.9,1.6 8,1.7 | v4.2,7 8.5,7 9.75,5.75
  PWR 0.406: v19.45,7 19.45,6.65 | 34.7,6.8 34.7,6.7 35,6.4 | v36.4,6.8 36.2,6.8 36.1,6.7
  PWR 0.61: v21.9,18.4 21.9,18.2
  other vias: 21.9,18.9 21.9,17.9
  pour PWR: 9.6,7.2 11.7,7.2 11.7,19 22.2,19 22.2,7.1 37.6,7.1 37.6,4 20,4 20,0 7.5,0 7.5,2.9 9.6,2.9
+5V  (via drill 0.2)
  Top 0.2: J4.1 11.5,20.4 v11.8,20.7
  Top 0.406: J1.1 5.95,13.8 D1.4 6.1,14.7 v6,14.8 | Q2.D2 9.35,9.58 Q2.D 9.35,11 v9.3,11.25
  Top 0.61: F1.2 19.85,20.35 v19.8,20.4 | D3.C v17.9,20.8
  PWR 0.2: v11.8,20.7 12,20.7
  PWR 0.406: v6,14.8 6,15.1 | v9.3,11.25 9.3,11 9.4,11.1
  PWR 0.61: v19.8,20.4 19.2,20.4 19,20.6 | v17.9,20.8 18.2,20.8 18.3,20.9
  Bottom 0.406: VSUB.X 5.7,14.5 v6,14.8
  pour PWR: 23.3,25 4.45,25 4.45,22.7 arc-90 2.3,20.55 0,20.55 0,7.8 11.2,7.8 11.2,19.5 23.3,19.5
GND  (via drill 0.2)
  Top 0.2: PB1.4 19.62,14.03 v19.6,14
  Top 0.305: U5.17 8.65,1.75 v8.9,1.7
  Top 0.406: C13.2 9.15,14.75 C12.2
  MID 0.2: v19.6,14 19.6,14.1 19.4,14.3
  other vias: 31.7,10.1 6.8,5.7 7.9,5.7 9,5.7 9,3.6 7.9,3.6 6.8,3.6 6.8,4.7 7.9,4.7 8.9,4.7 5.3,10.8 5.2,0.9 10.7,0.8 24.7,4.5 26.95,6.65 26.5,19.7 8.55,10.45 3.4,7 14.2,15.4 16.55,13.81 19.7,16.8 25.59,12.52 16.4,8 30.98,17.77 29.14,11.77 31.1,18.85 0.6,4.9 6.15,23.55 35.23,16.77 44.84,15.16 53.13,13.06 33.85,20.95 54.53,4.76 11.3,8.6 21.34,6.87
  pour Bottom: 0,0 0,25 43.8,25 43.8,21.2 47.1,17.9 49,17.9 50.2,16.7 61.5,16.7 61.5,0
  pour Top: 0,-0.1 0,24.9 28.5,25 55.8,25.1 55.8,0.1
  pour MID: 0,20.55 2.4,20.55 arc90 4.45,22.6 4.45,25 21,25 21,21.3 28.3,21.3 28.3,25 31.25,25 31.25,21.3 43.9,21.3 47.2,17.9 49,17.9 50.2,16.7 55.5,16.7 55.5,3.7 21,3.7 21,0 4.5,0 4.5,2.1 arc90 2.1,4.5 0,4.5
LED_BLUE  (via drill 0.2)
  Top 0.2: DL4.2 40.65,12.5 v40.6,12.45 | U2.17 54,15.8 v53.9,15.7
  Bottom 0.2: 40.7,12.35 v40.6,12.45 40.75,12.3 47,12.3 49.85,15.15 53.35,15.15 v53.9,15.7
LED_GREEN  (via drill 0.2)
  Top 0.2: DL4.1 40.95,11.45 v40.6,11.8 | U2.16 55,15.9 v54.8,15.7
  Bottom 0.2: v40.6,11.8 40.7,11.7 47.35,11.7 50.4,14.75 53.8,14.75 54.75,15.7 v54.8,15.7
LED_RED  (via drill 0.2)
  Top 0.2: 40.59,13.13 v40.6,13.15 41,13.55 DL4.3 | U2.18 53,15.8 v53.1,15.7
  Bottom 0.2: v40.6,13.15 40.65,13.2 46.59,13.2 49.09,15.7 v53.1,15.7
N17658775  (via drill 0.2)
  Top 0.2: PB1.6 18.1,15.2 v18.3,15.4 | v27.1,20.6 R3.1
  PWR 0.2: v27.1,20.6 25.8,20.6 24,18.8 23.4,18.8 23.1,18.5 23.1,18.3 22.1,17.3 21.9,17.3 20,15.4 v18.3,15.4
N17798864
  Top 0.305: DL2.A 1.35,6.85 1.7,7.2 2.75,7.2 R23.1
N17834267
  Top 0.305: 3.05,18.9 DL3.A 2.95,19.5 3.7,20.25 R27.1
N17852357  (via drill 0.2)
  Top 0.2: U1.6 30.05,12.25 v30.5,11.8 32.3,11.8 C27.1 33.9,11.15 L3.2 34.9,11.45 C23.1
N17852431
  Top 0.305: U1.43 26.45,8.1 C25.1
N$1
  Top 0.61: C1.1 4.55,17.15 | 4.55,17.15 4.55,16.15 J1.11 2.35,15.6 J1.10 J1.9 J1.8 J1.7 2.35,9.4 J1.6 4.97,9.4 6.3,10.72 D1.1 | R1.2 4.55,17.15
N$2
  Top 0.61: F1.1 22.15,22.64 J5.14
N$3
  Top 0.61: F2.1 13.35,9.75 14.4,8.7 J7.1
N$4  (via drill 0.2)
  Top 0.2: R2.1 22.5,8.9 22.8,8.6 22.8,7.7 v23.1,7.4
  Bottom 0.2: J2.3 24.7,10.13 24.7,7.6 24.5,7.4 v23.1,7.4
N$5
  Top 0.2: R32.1 39.9,22.64 J5.7
N$6  (via drill 0.2)
  Top 0.2: U1.8 30.25,13.25 30.4,13.4 31,13.4 v31.25,13.65 | C6.1 R9.2 R8.1 39.95,7.4 v39.1,7.4
  PWR 0.2: v33.4,3.1 33.85,3.1 38.15,7.4 v39.1,7.4
  MID 0.2: v31.25,13.65 31.25,13.45 32.7,12 32.7,3.8 v33.4,3.1
N$7
  Top 0.305: DL1.A R15.2
N$8
  Top 0.2: R31.1 J5.6
N$9  (via drill 0.2)
  Top 0.2: U2.19 v52,17.9 | 43.92,18.77 R7.1 | v44.8,18.8 44.05,18.8 R7.1 | Q5.6 43.2,18.05 R7.1
  MID 0.2: v52,17.9 52,16.8 51.8,16.6 49.9,16.6 48.16,18.34 45.26,18.34 v44.8,18.8
  Bottom 0.2: RST.X 44.19,18.19 v44.8,18.8
N$10
  Top 0.305: DL1.C 16.97,23.85 Q1.D
N$11  (via drill 0.2)
  Top 0.2: U2.35 47.5,14.15 48.6,15.25 50.75,15.25 51.1,14.9 v51.1,14.1 | R18.1 38.65,19.25 v38.7,19.3
  MID 0.2: v38.7,19.3 38.8,19.3 39.3,18.8 44,18.8 44.45,19.25 47.15,19.25 47.2,19.2 51.5,19.2 52.5,18.2 52.5,15.6 v51.1,14.1
  Bottom 0.2: v51.1,14.1 51.1,13.73 JCLK.X
N$12  (via drill 0.2)
  Top 0.2: U2.31 49.25,9.75 v49.5,10 | R20.1 37.7,16.9 v37.9,16.7
  MID 0.2: v37.9,16.7 39.8,16.7 44.6,11.9 45,11.9 45.2,11.7 45.2,7.1 45.6,6.7 46.6,6.7 46.8,6.9 46.8,9.1 U2.31 49.25,9.75 v49.5,10
  Bottom 0.2: v49.5,10 49.91,10 JTMS.X
N$13
  Top 0.2: U2.24 47,17.4 46.2,18.2 46.2,19.2 46,19.4 R17.1
N$14
  Top 0.2: DL4.5 37.25,12.5 37,12.75 R34.2
N$15  (via drill 0.2)
  Top 0.24: C15.2 13.15,18.15 L2.1
  Top 0.305: v10.3,2.6 10.3,3.35 10.24,3.4 U5.19 U5.20
  Top 1.27: L2.1 14.05,17.65 v14.1,17.7 | v10.3,2 10.3,3.35
  Bottom 1.27: v10.3,2 10.4,2.1 14.5,2.1 18,5.6 18,13.8 v14.1,17.7
N$16
  Top 0.2: DL4.6 38.98,10.43 R35.2
N$17  (via drill 0.2)
  Top 0.19: 10.1,6.2 v10,6.4
  Top 0.2: 10.1,6.1 10.1,5.95 U5.24 10.46,6.3 12,6.3 12.3,6.6 12.3,8.3 12.35,8.35 C14.1 | U5.1 9.29,6.8
  Top 0.305: Q2.K 10.65,9.12 Q2.K2 | R27.2 v5.3,20.9 | 10.1,6.1 10.1,6.2
  Top 0.605: 9.39,6.8 9.29,6.8 v10,6.4
  Top 0.61: 9.35,6.85 9.39,6.8 9.4,6.8 | Q2.K2 v11.1,9.55 | v8.7,9.3 8.7,8.75 9.31,8.75 Q2.S
  PWR 0.305: v5.3,20.9 5.3,12.7 v8.7,9.3
  PWR 0.605: v10,6.4 9.95,6.4 10.65,7.1 10.65,9.2 v11.1,9.55
  Bottom 0.61: v8.7,9.3 10.85,9.3 v11.1,9.55
N$18  (via drill 0.2)
  Top 0.305: U5.21 11.3,4.4 11.6,4.7 v11.6,4.9 | v11.6,16.5 11.9,16.5 C15.1
  PWR 0.305: v11.6,4.9 11.7,4.9 11.85,5.05 11.85,16.25 v11.6,16.5
N$19  (via drill 0.2)
  Top 0.2: U5.10 5.2,4.4 5,4.2 5,4 v4.7,3.7 | R28.1 9.3,7.5 v8.9,7.9
  Bottom 0.2: v8.9,7.9 8.9,7.4 8.3,6.8 6.6,6.8 5.2,5.4 5.2,4.2 v4.7,3.7
N$20
  Top 0.2: DL4.4 38.98,14.53 R36.2
N$21  (via drill 0.2)
  Top 0.24: C16.1 R30.1 7.5,0.85 7.5,1.3 v7.3,1.5 | U5.22 v10.7,4.9
  MID 0.24: v10.7,4.9 10.7,4.8 10.8,4.7 10.8,1.6 10,0.8 8,0.8 v7.3,1.5
N$22  (via drill 0.2)
  Top 0.2: U5.8 5.1,5.4 4.6,4.9 v3.2,4.9 | R26.2 10.55,18.3 v10.45,18.35 | Q3.D 6.95,14.9 v7.3,14.55
  Bottom 0.2: v3.2,4.9 3.1,4.9 2.85,5.15 2.85,7.1 4.1,8.35 5.9,8.35 7.15,9.6 7.15,14.4 v7.3,14.55 7.15,14.7 7.15,15.8 8.8,17.45 9.55,17.45 v10.45,18.35
N$23  (via drill 0.2)
  Top 0.24: U5.11 U5.12 5.75,3 R29.2 5.35,2.65 v4.9,3.1 | R30.2 6,0.8 v5.9,0.9
  Bottom 0.24: v4.9,3.1 4.9,1.9 v5.9,0.9
N$24  (via drill 0.2)
  Top 0.2: R25.2 5.5,8.6 v5.7,8.8 | U5.9 5.1,4.9 v4.4,4.2
  MID 0.2: v5.7,8.8 5.7,5.5 v4.4,4.2
N$25  (via drill 0.2)
  Top 0.2: U2.5 50,8.9 v49.55,9.35
  Bottom 0.2: v49.55,9.35 47.05,9.35 LPO_IN.X
N$26  (via drill 0.2)
  Top 0.2: v48.8,10.9 47.5,10.9 U2.32 | R22.2 v44.45,10.15
  Bottom 0.2: JTDO.X 49.77,11.87 v48.8,10.9 45.45,10.9 44.7,10.15 v44.45,10.15
N$27  (via drill 0.2)
  Top 0.2: R12.2 v44.45,8.8 | v53.15,9.35 53,9.2 U2.8
  PWR 0.2: v44.45,8.8 52.6,8.8 v53.15,9.35
N$28
  Top 0.2: Q5.5 44.05,17.3 | 44.05,17.3 44.35,17.3 R17.2 | R11.1 44.05,17.3
PA00_XIN32
  Top 0.2: U1.1 29.73,5.97 30.3,5.4 31.21,5.4 Y1.2 31.46,5.15 C3.2
PA01_XOUT32
  Top 0.2: U1.2 30.65,10.25 31.2,9.7 31.2,8.61 Y1.1 31.39,8.05 C4.2
PA02_AIN0  (via drill 0.2)
  Top 0.2: U1.3 30.75,10.75 v30.8,10.8
  MID 0.2: J3.2 25.14,2.8 25.3,2.8 31,8.5 31,10.6 v30.8,10.8
PA03_VREFA  (via drill 0.2)
  Top 0.2: U1.4 31,11.25 31.45,10.8 v31.7,10.8 | C7.1 C5.1 22.85,3.06 J3.1
  MID 0.2: v31.7,10.8 31.2,11.3 30.45,11.3 29.9,10.75 29.9,8 25.6,3.7 23.9,3.7 22.61,2.4 22.2,2.4 J3.1
PA04_AIN4  (via drill 0.2)
  Top 0.2: v30.7,13.9 30.4,13.9 30.3,13.8 29.77,13.8 U1.9
  MID 0.2: J3.5 32.3,2.4 32.2,2.4 32.2,11 31.05,12.15 31.05,13.1 30.7,13.45 v30.7,13.9
PA05_AIN5  (via drill 0.2)
  Top 0.2: U1.10 29.77,14.3 30.2,14.3 30.3,14.4 v31.2,14.4
  MID 0.2: v31.2,14.4 31.3,14.4 31.3,14.35 33.1,12.55 33.1,4.08 J3.6
PA06_AIN6  (via drill 0.2)
  Top 0.2: U1.11 30.55,14.75 v30.7,14.9
  MID 0.2: v30.7,14.9 31.4,14.9 33.5,12.8 33.5,5.1 34.4,4.2 35.52,4.2 J3.7
PA07_AIN7  (via drill 0.2)
  Top 0.2: U1.12 29.73,15.43 29.9,15.6 v31.2,15.6
  MID 0.2: v31.2,15.6 31.3,15.6 32.5,14.5 33.9,13.1 33.9,5.3 34.6,4.6 37.66,4.6 J3.8
PA08_S0_I2C_SDA  (via drill 0.2)
  Top 0.2: U1.13 28.95,17.05 v29.8,17.9 | 33.61,16.99 v33.6,17 | v7.6,21.8 8.5,20.9 J4.4 v8.5,18.6 | U5.6 6.65,8.05 v6.45,8.25 | U4.5 33.21,16.61 v33.6,17 | R14.1 33.4,17.2 v33.6,17 | R18.2 35.9,19.25 v35.65,19 | v41.23,21.99 41.23,20.82 R31.2
  PWR 0.19: 32.33,24.12 32.26,24.06 | 32.26,24.06 31.25,23.05 31.25,22.75 28.88,20.38 28.88,19.25 29.75,18.38 29.75,18 v29.8,17.9 | v18.88,21.38 21.62,24.12 32.25,24.12 32.26,24.06
  PWR 0.2: 32.33,24.12 40.33,24.12 41.23,23.23 v41.23,21.99
  MID 0.2: v6.45,8.25 6.4,8.3 6.4,14.55 6.45,14.6 6.45,16.55 v8.5,18.6
  Bottom 0.19: v18.88,21.38 16.75,23.5 9.25,23.5 7.62,21.88 v7.6,21.8
  Bottom 0.2: v7.6,21.8 6.8,21.8 ESDA.X | v29.8,17.9 30.7,17 v33.6,17 35.6,19 v35.65,19
PA09_S0_I2C_SCL  (via drill 0.2)
  Top 0.19: v30.25,18.38 30.25,18.4 | v27.12,19.38 27.12,19.25
  Top 0.2: 28.5,16.07 U1.14 28.48,16.02 28.5,16.05 28.5,17.2 28.45,17.25 | 28.45,17.25 29.6,18.4 30.25,18.4 32.25,18.4 R13.1 32.4,17.15 32.71,16.84 U4.6 | v9.3,21 9.5,20.8 J4.3 v9.5,18.6 | U5.5 7.15,8.35 v6.9,8.6 | 27.12,19.25 27.12,18.57 28.45,17.25 | R20.2 35.7,18 v35.6,17.9 | v38.73,21.98 38.73,20.77 R32.2
  PWR 0.19: v30.25,18.38 29.25,19.38 29.25,19.8 31.07,21.62 32.75,21.62 33.75,22.62 33.75,23 34.5,23.75
  PWR 0.2: 34.5,23.75 38.2,23.75 38.73,23.23 v38.73,21.98
  MID 0.19: v27.12,19.38 26.88,19.38 26.75,19.25 25.62,19.25 25.38,19.5 24.55,19.5
  MID 0.2: 24.55,19.5 24.3,19.25 22.35,19.25 22.15,19.45 10.35,19.45 v9.5,18.6 9.5,15.5 6.8,12.8 6.8,8.7 v6.9,8.6
  Bottom 0.2: v9.3,21 ESCL.X | v35.6,17.9 34,16.3 30.4,16.3 29.3,17.4 29.3,18.1 29.6,18.4 30.23,18.4 v30.25,18.38
PA10_TCC0-W2  (via drill 0.2)
  Top 0.2: U1.15 28,16.07 28,16.85 v28.05,16.9
  PWR 0.2: 47.5,2.38 J3.11
  MID 0.2: 47.5,2.38 J3.11 44.88,5 34.8,5 34.3,5.5 34.3,13.3 32.9,14.7 31.4,16.1 28.85,16.1 v28.05,16.9
PA11_TCC0-W3  (via drill 0.2)
  Top 0.2: v27.4,17.55 27.4,16.07 U1.16
  MID 0.2: v27.4,17.55 27.5,17.6 28.1,17.6 29.2,16.5 31.7,16.5 34.7,13.5 34.7,5.7 35.05,5.35 47.06,5.35 J3.12
PA12_S2_TX/MOSI  (via drill 0.2)
  Top 0.2: v24.1,19.7 24.2,19.7 24.7,19.2 24.7,18.7 24.95,18.45 U1.21 | U2.36 47.85,15.25 47.9,15.3 v48.1,15.55
  MID 0.2: v24.1,19.7 24.5,20.1 26.2,20.1 26.3,20.2 26.7,20.2 26.8,20.1 33,20.1 35.1,18 35.1,17.7 35.4,17.4 35.8,17.4 36.31,17.91 41.11,17.91 41.59,17.44 46.21,17.44 v48.1,15.55
PA13_S2_RX/MISO  (via drill 0.2)
  Top 0.2: U1.22 24.45,18.35 v23.1,19.7 | U2.1 v46,7.2
  MID 0.2: v46,7.2 46,11.75 49.5,15.25 49.5,16.5 48.01,17.99 41.52,17.99 41.19,18.32 36.27,18.32 36.1,18.5 35.15,18.5 32.45,21.2 23.5,21.2 23.1,20.8 v23.1,19.7
PA14_S2_RTS/CS  (via drill 0.2)
  Top 0.2: v23.6,18.3 23.9,18 23.9,16.07 U1.23 | U2.28 45.15,12.5 v44.9,12.75 | U2.21 50.15,16.77 50.15,20.25 v50.25,20.35
  PWR 0.2: v44.9,12.75 44.9,13.6 50.25,18.95 v50.25,20.35
  Bottom 0.2: v23.6,18.3 24.8,19.5 25.4,19.5 26.9,18 28.6,18 29.4,18.8 30,18.8 31.2,20 45.25,20 46.3,21.05 49.55,21.05 v50.25,20.35
PA15_S2_CTS/SCK  (via drill 0.2)
  Top 0.19: v23.38,16.75 23.38,16.12 U1.24
  Top 0.2: U2.29 44.65,11.5 v44.45,11.25 | v46.7,19.7 46.8,19.8 46.8,20.4 47.25,20.85 50.8,20.85 51.05,20.6 51.05,16.68 U2.20
  MID 0.19: 24.82,5.05 25.5,4.38 v25.5,4.25
  MID 0.2: v23.38,16.75 23.38,8.88 22.6,8.1 22.6,6.7 23.3,6 23.88,6 24.82,5.05
  Bottom 0.2: v44.45,11.25 37.3,11.25 36.67,11.88 | 36.67,11.88 44.25,19.45 46.45,19.45 v46.7,19.7 | 36.67,11.88 32,7.2 30.1,7.2 27.15,4.25 v25.5,4.25
PA16_S1_MOSI  (via drill 0.2)
  Top 0.19: v22.75,17 22.75,15.25 U1.25
  PWR 0.19: 50,22.62 J5.3
  Bottom 0.19: 31,20.38 30.75,20.15
  Bottom 0.2: 31,20.38 45.08,20.38 46.1,21.4 48.81,21.4 J5.3 | 30.75,20.15 26.85,20.15 26.2,20.8 23,20.8 22.4,20.2 22.4,17.35 v22.75,17
PA17_S1_SCK  (via drill 0.2)
  Top 0.19: U1.26 22.3,14.75 22,15.05 22,17.25 22.88,18.12 22.88,18.75 22.05,19.57 19.75,19.57 19.25,20.07 19.25,21.12 v19.5,21.38
  MID 0.19: v19.5,21.38 21.12,23 21.12,23.12 21.88,23.88 46.38,23.88 47.5,22.75 J5.4
PA18_OTG  (via drill 0.2)
  Top 0.19: U1.27 22.3,14.25 21.62,14.93 21.62,15.38 21,16 17,16 14.5,13.5 v8.88,13.5
  Top 0.2: J1.4 4.89,11.86 v4.85,11.85 | R21.2 v7.65,16.95 7.45,16.75 Q3.G 7.95,15.72 v7.95,15.45
  Bottom 0.19: 4.82,11.82 v4.85,11.85
  Bottom 0.2: v4.85,11.85 4.9,11.85 4.9,12.74 4.9,15.05 6.8,16.95 v7.65,16.95 | 8.9,13.5 v8.88,13.5 8.95,13.5 9.15,13.7 9.15,14.25 v7.95,15.45
PA19_S1_MISO  (via drill 0.2)
  Top 0.2: U1.28 21.55,13.75 v21.3,14
  PWR 0.2: v21.3,14 26.55,14 30.7,18.15 30.7,18.6 30.4,18.9 30.4,20.4 31.25,21.27 33.08,21.27 v33.6,21.8
  MID 0.2: v33.6,21.8 33.6,21.6 33.8,21.5 43.84,21.5 J5.5
PA20_TCC0-W6  (via drill 0.2)
  Top 0.2: Q1.G 15.32,22.73 R16.2 15.25,22.65 v14.5,22.65 | 20.8,15.4 v20.8,15.5 21.1,15.2 21.1,14.65 20.85,14.4 20.85,13.6 21.05,13.4 21.6,13.4 21.75,13.25 U1.29
  PWR 0.19: J5.1 55.12,22.75 53.25,24.62 16.5,24.62 14.5,22.62 v14.5,22.65
  Bottom 0.2: v20.8,15.5 20.8,17.25 R16.2 14.6,22.75 v14.5,22.65
PA21_TCC0-W7  (via drill 0.2)
  Top 0.2: J4.2 10.5,20.7 v10.8,21 | U1.30 21.75,12.75 21.5,13 20.9,13 20.5,13.4 20.5,14.7 v20.6,14.8
  MID 0.19: J5.2 52.5,22.75 51,24.25 21.12,24.25 18.12,21.25 11.12,21.25 10.88,21 v10.8,21
  Bottom 0.2: v10.8,21 11.3,21.5 11.58,21.5 EWK.X 12.48,22.4 14,22.4 14.2,22.2 15.2,22.2 20.3,17.1 20.3,15.1 v20.6,14.8
PA22_TC4-W0  (via drill 0.2)
  Top 0.19: U1.31 21.62,12.25 v21.38,12.5
  MID 0.19: v21.38,12.5 20.5,11.62 20.5,2.5 21.75,1.25 41.38,1.25 42.38,2.25 J3.9
PA23_TC4-W1  (via drill 0.2)
  Top 0.19: U1.32 21.5,11.75 v21.38,11.88
  MID 0.19: v21.38,11.88 21.88,12.38 21.88,12.62 21.5,13 21.25,13 20.12,11.88 20.12,2.38 21.62,0.88 43.5,0.88 44.88,2.25 J3.10
PA27_GPIO0  (via drill 0.2)
  Top 0.2: U1.39 24.45,7.45 v23.69,6.69 | U2.27 43.7,13.5 43.35,13.85 v43.35,14.4 | 43.3,14.45 v43.35,14.4 | v41.8,15.7 42.05,15.7 v43.35,14.4
  PWR 0.2: v19.45,4.35 23.7,4.35 24.35,3.7 33.95,3.7 41.5,11.25 41.5,15.4 v41.8,15.7 | 43.3,14.45 v43.35,14.4
  Bottom 0.2: v23.69,6.69 22.7,5.7 19.3,5.7 19,5.4 19,4.8 v19.45,4.35 | GPIO0.X 45.46,16.51 v43.35,14.4
PA28_ACK  (via drill 0.2)
  Top 0.19: U1.41 25.45,8.18 v25.55,8.07
  Top 0.2: v52,9.3 U2.7
  PWR 0.19: v25.55,8.07 25.9,7.72 25.9,7.12 | 27.02,6 27.73,6 27.75,6.03 28.4,6.03 29,6.62 v30.6,6.62
  PWR 0.2: 25.9,7.12 25.9,7 26.9,6 27.02,6
  Bottom 0.2: v30.6,6.62 33.33,6.62 34.85,8.15 51.45,8.15 52,8.7 v52,9.3
PA30_SWCLK  (via drill 0.2)
  Top 0.19: 27.27,7.5 27.45,7.67 U1.45
  Top 0.2: R4.1 24.95,20.55 24.7,20.3 v23.6,20.3 | 27.27,7.5 v27,7.5 | v42.3,8.8 R12.1
  MID 0.2: v36.5,12.5 37.6,12.5 41.3,8.8 v42.3,8.8
  Bottom 0.2: v23.6,20.3 23.6,19.1 23.1,18.6 23.1,18 24.8,16.3 24.8,14.77 J2.4 26.4,13.17 26.4,7.9 26.8,7.5 v27,7.5 27.55,6.95 28.35,6.95 29.1,7.7 29.1,11.1 30.35,12.35 36.35,12.35 v36.5,12.5
PA31_SWDIO  (via drill 0.2)
  Top 0.2: U1.46 27.95,7.95 v28,7.95 28.45,7.5 v28.45,4.85 | v42.25,10.15 R22.1
  PWR 0.2: v36.3,8.85 35.9,8.85 32.05,5 28.6,5 v28.45,4.85
  Bottom 0.2: J2.2 28.25,13.86 28.25,8.2 v28,7.95 | v36.3,8.85 37.6,10.15 v42.25,10.15
PB02_AIN10
  Top 0.2: J3.3 27.21,2.56 28.95,4.3 28.95,7.65 28.45,8.15 U1.47
PB03_AIN11
  Top 0.2: U1.48 28.95,8.45 29.3,8.1 29.3,2.79 J3.4
PB08_RST  (via drill 0.2)
  Top 0.2: U1.7 30.45,12.75 v30.6,12.9 | Q5.2 v40.7,17.3 R10.1
  Bottom 0.2: v30.6,12.9 30.7,13 32.2,13 36.5,17.3 v40.7,17.3
PB10_TCC0-W4  (via drill 0.2)
  Top 0.19: 26,16.07 U1.19
  Top 0.2: 26,16.07 26,16.75 v25.85,16.9
  MID 0.19: 33.7,15.1 31.9,16.9 29.4,16.9 28.2,18.1 27.2,18.1
  MID 0.2: 33.7,15.1 35.1,13.7 35.1,6 35.2,5.9 49.05,5.9 J3.13 | 27.2,18.1 27.05,18.1 v25.85,16.9
PB11_TCC0-W5  (via drill 0.2)
  Top 0.19: v25.4,17.5 25.4,16.07 U1.20
  MID 0.19: 29.6,17.3 28.4,18.5 26.4,18.5 v25.4,17.5
  MID 0.2: J3.14 51.2,6.3 35.6,6.3 35.5,6.4 35.5,13.8 32,17.3 29.6,17.3
PB22_S5_TX  (via drill 0.2)
  Top 0.2: U1.37 23.45,8.35 23.4,8.3 v23.4,8 | v47.55,20.2 47.55,19.5 v46.85,18.8 48,17.65 U2.23
  PWR 0.19: 32.1,9.2 30.1,9.2 29.8,9.5 23.98,9.5 U1.37 23.45,8.05 v23.4,8
  PWR 0.2: 34.8,22.62 J5.9 34.7,22.52 34.7,20.8 32.7,18.8 32.7,9.8 32.1,9.2 | v47.55,20.2 38.05,20.2 v37.4,20.85
  Bottom 0.2: v37.4,20.85 36.65,20.85 J5.9 | RXD.X 46.73,18.68 v46.85,18.8
PB23_S5_RX  (via drill 0.2)
  Top 0.2: U1.38 23.95,8.05 v24,8 | U2.22 49,17.15 48.55,17.6 48.55,19.5 v48.35,19.7
  PWR 0.19: 32.3,8.8 29.9,8.8 29.57,9.12 24.12,9.12 24,9 v24,8
  PWR 0.2: 32.3,8.8 33.1,9.6 33.1,18.39 J5.8 37.38,22.1 38.73,20.75 47.8,20.75 48.35,20.2 v48.35,19.7
  Bottom 0.2: TXD.X 48.02,16.65 47.95,16.65 47.4,17.2 47.4,18.4 47.3,18.5 47.3,19.7 47.1,19.9 47.1,20.5 47.3,20.7 47.85,20.7 48.35,20.2 v48.35,19.7
PMICINT  (via drill 0.2)
  Top 0.2: v7.7,8.7 7.65,8.75 7.65,9.1 R24.2 | U5.7 5,5.9 4.5,5.4 v3.9,5.4
  Bottom 0.19: 7.75,8.75 v7.7,8.7
  Bottom 0.2: v7.7,8.7 8.3,8.1 8.3,7.5 8,7.2 6.3,7.2 4.4,5.3 4,5.3 v3.9,5.4
RESET#
  Top 0.2: 32.34,22.62 32.34,21.55 R6.2 31.49,20.45 33,20.45 34.9,18.55 34.9,17.8 36.75,15.95 40.15,15.95 40.75,16.55 Q5.3
  Top 0.305: 32.34,22.62 J5.10
RESETN  (via drill 0.2)
  Top 0.2: R6.1 R3.2 C2.1 v29.7,19.6 R5.1 | U1.40 24.95,7.75 v25.35,7.35 | R2.2 20.2,8.9 19.7,8.4 19.2,8.4 18.9,8.1 18.9,5.8 v19.5,5.2
  MID 0.2: v29.7,19.6 29,18.9 26.1,18.9 24.9,17.7 24.9,7.8 v25.35,7.35
  Bottom 0.2: v19.5,5.2 23.2,5.2 v25.35,7.35
STAT  (via drill 0.2)
  Top 0.305: U5.4 7.65,7.65 v7.7,7.7 | 3,6.1 DL2.C 3,6 v4.2,6
  Bottom 0.305: v7.7,7.7 5.9,7.7 v4.2,6
USB_N  (via drill 0.2)
  Top 0.19: J1.2 arc90 4.29,12.98 7.9,12.98 | U1.33 21.58,11.25 arc-90 20.93,11.9 20.93,11.85 arc90 19.8,12.98 7.9,12.98 | 7.9,12.98 8,13.08 8,13.8
  Top 0.24: v8,14.7 D1.3 D-.X 8,13.8
  Bottom 0.19: 8.2,14 D-.X
  Bottom 0.24: v8,14.7 8,14.1 D-.X
USB_P  (via drill 0.2)
  Top 0.19: J1.3 arc-90 4.24,12.62 7.9,12.62 | U1.34 21.72,10.75 arc-90 20.57,11.8 20.57,11.85 arc90 19.8,12.62 7.9,12.62 | D1.2 8,12.52 7.9,12.62
  Top 0.24: D1.2 v8,10.9
  Bottom 0.24: 8,11.5 D+.X 8,11.6 v8,10.9
VBATT  (via drill 0.2)
  Top 0.2: R8.2 40,4.5 v40.1,4.4
  Top 0.305: U5.14 U5.13
  Top 0.61: U5.13 v6.5,2.5 | v14.1,10.1 14.1,11.25 D2.C 12.2,11.3 F2.2
  PWR 0.2: v6.5,2.5 U5.13 6.8,2.65 9.45,2.65 9.9,3.1 14.4,3.1 v15.8,1.7
  Bottom 0.2: v40.1,4.4 40.1,4 39.8,3.7 17.8,3.7 v15.8,1.7
  Bottom 0.61: v6.5,2.5 8.85,2.5 9.88,3.5 13,3.5 14.1,4.6 BATT+.X v14.1,10.1
VIN  (via drill 0.2)
  Top 0.2: Q2.A 10.65,11.1 | R19.2 10.65,11.1 | 10.65,11.1 v10.6,11.35 | Q2.G 10,8.4 v9.8,8.2
  PWR 0.2: v9.8,8.2 10.1,8.5 10.1,10.65 v10.6,11.35
  PWR 0.61: v10.6,11.35 10.6,17.5 12.7,19.6 21.61,19.6 J5.13 24.7,22.64
VUSB1  (via drill 0.2)
  Top 0.305: U5.23 10.5,5.4 10.8,5.7 v11,5.7
  Top 0.61: v13.9,21.7 D3.A | v12.7,14.4 12.6,14.3 C12.1 11.2,15.1 C13.1
  Bottom 0.61: v11,5.7 12.2,5.7 12.7,6.2 v12.7,14.4 12.7,20.5 v13.9,21.7

## Text on the board
test-probe: 5V | VIN(5V) | VCC | GND | RESET | 14 | 13 | 12 | 11 | 10 | 9 | 8 | 7 | 6 | USB_5V | USB_D- | SWCLK | SWDIO | JGND | JRST | VTG | BATT+ | BATT- | USB_D+ | USB_GND | AREF | A0 | A1 | A2 | A3 | A4 | A5 | A6 | 0 | 1 | 2 | 3 | 4 | 5